# EAGLE board sumo1 (EAGLE 8.3.2)
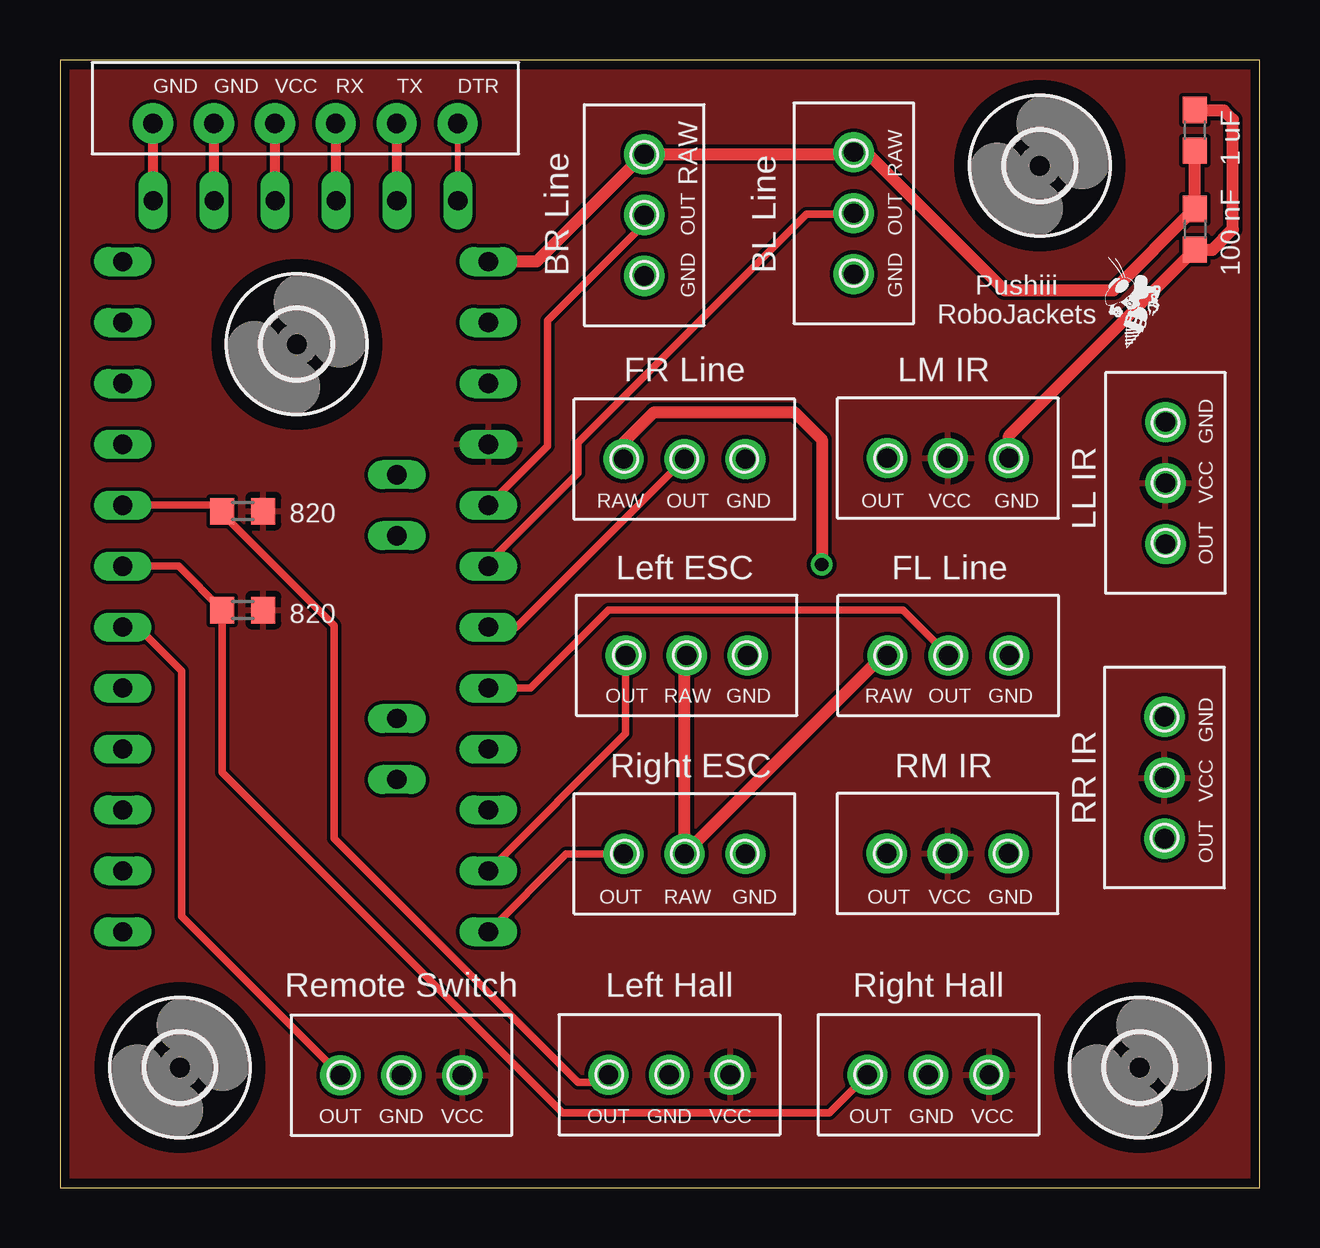
[diagram p0: board, top side]
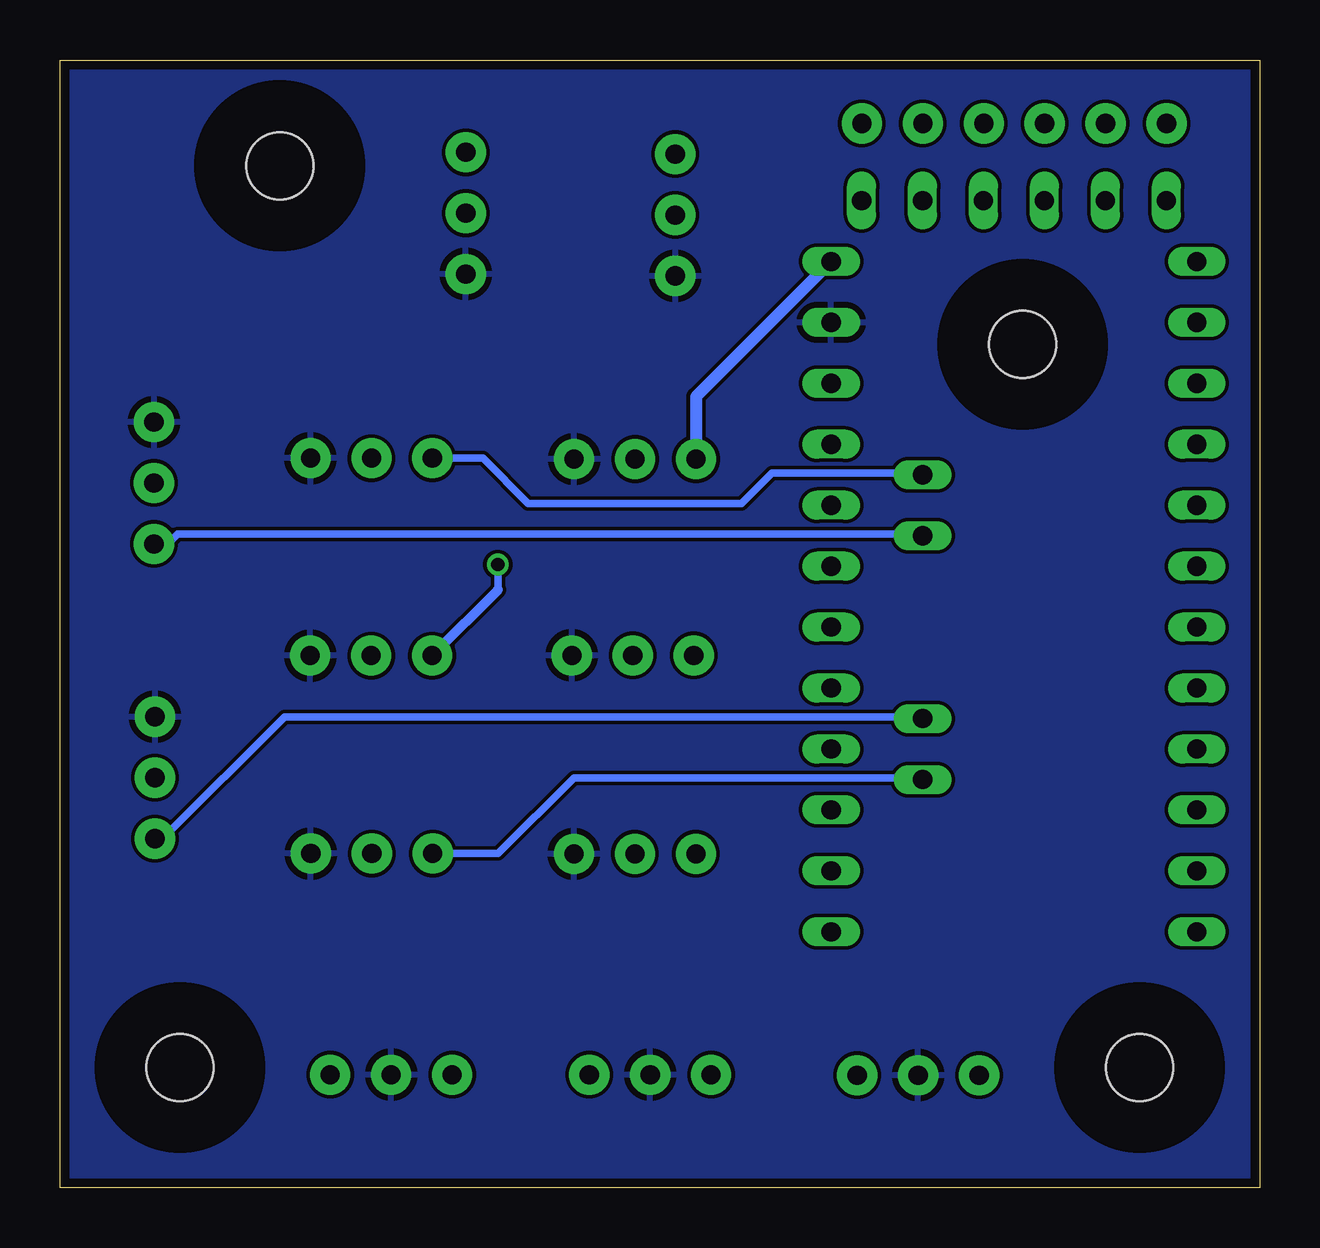
[diagram p1: board, bottom side, seen from below]

Size 50 x 47 mm. Coordinates in mm from the lower left corner, seen from the top.
Outline: 0,0 50,0 50,47 0,47 0,0
Copper layers (1*16): Top 0.0356mm / dielectric 1.5011mm / Bottom 0.0356mm
Design rules "LaenPCBOrder": minimum track width 6mil, minimum drill 13mil, track to track 6mil, track to pad 6mil, pad to pad 6mil, via to via 6mil, smd to smd 6mil, copper to edge 15mil, drill to drill 6mil, minimum pad ring 7mil, minimum via ring 7mil, stop-mask expansion 3mil, vias tented up to drill 0mil, thermal gap 10mil

## Footprints (pad centres in the part's own frame; a part is rotated, then mirrored left to right if it is on the bottom)
PHOENIX_CONTACT_3PIN = drill 0.8 pad 1.676: P$1 -2.54,0; P$2 0,0; P$3 2.54,0
C0603 = smd 1.1 x 1: 1 -0.85,0; 2 0.85,0
R0603 = smd 1 x 1.1: 1 -0.85,0; 2 0.85,0
PRO-MINI-2 = drill 0.8 long: A0 6.35,2.54; A1 6.35,0; A2 6.35,-2.54; A3 6.35,-5.08; A4 2.54,1.27; A5 2.54,3.81; A6 2.54,-8.89; A7 2.54,-6.35; D2 -8.89,2.54; D3 -8.89,0; D4 -8.89,-2.54; D5 -8.89,-5.08; D6 -8.89,-7.62; D7 -8.89,-10.16; D8 -8.89,-12.7; D9 -8.89,-15.24; D10 6.35,-15.24; D11 6.35,-12.7; D12 6.35,-10.16; D13 6.35,-7.62; DTR 5.08,15.24; GND 6.35,10.16; GND1 -8.89,5.08; GND2 -7.62,15.24; GND3 -5.08,15.24; RAW 6.35,12.7; RST 6.35,7.62; RST1 -8.89,7.62; RX1 -8.89,10.16; RX1-1 0,15.24; TX0 -8.89,12.7; TX0-1 2.54,15.24; VCC 6.35,5.08; VCC1 -2.54,15.24
6-PIN = drill 0.8 pad 1.676: DTR -7.62,-1.27; GND3 5.08,-1.27; GND4 2.54,-1.27; RX -2.54,-1.27; TX -5.08,-1.27; VCC 0,-1.27
2,8 = hole 2.8: 0,0

## Placement (x,y rotation side)
BL  PHOENIX_CONTACT_3PIN  [PHOENIX_CONTACT_3PIN]  33.09,40.62 270 top
BR  PHOENIX_CONTACT_3PIN  [PHOENIX_CONTACT_3PIN]  24.35,40.54 270 top
C1  100nF  [C0603]  47.31,39.94 270 top
C2  1uF  [C0603]  47.31,44.07 90 top
FL  PHOENIX_CONTACT_3PIN  [PHOENIX_CONTACT_3PIN]  37.03,22.17 0 top
FR  PHOENIX_CONTACT_3PIN  [PHOENIX_CONTACT_3PIN]  26.03,30.36 0 top
L_ESC  PHOENIX_CONTACT_3PIN  [PHOENIX_CONTACT_3PIN]  26.12,22.18 0 top
L_HALL  PHOENIX_CONTACT_3PIN  [PHOENIX_CONTACT_3PIN]  25.4,4.7 180 top
LL_IR  PHOENIX_CONTACT_3PIN  [PHOENIX_CONTACT_3PIN]  46.08,29.37 90 top
LM_IR  PHOENIX_CONTACT_3PIN  [PHOENIX_CONTACT_3PIN]  37.02,30.4 0 top
R1  820  [R0603]  7.62,28.2 0 top
R2  820  [R0603]  7.62,24.07 0 top
R_ESC  PHOENIX_CONTACT_3PIN  [PHOENIX_CONTACT_3PIN]  26.04,13.91 0 top
R_HALL  PHOENIX_CONTACT_3PIN  [PHOENIX_CONTACT_3PIN]  36.2,4.7 180 top
R_S  PHOENIX_CONTACT_3PIN  [PHOENIX_CONTACT_3PIN]  14.23,4.68 180 top
RM_IR  PHOENIX_CONTACT_3PIN  [PHOENIX_CONTACT_3PIN]  37,13.92 0 top
RR_IR  PHOENIX_CONTACT_3PIN  [PHOENIX_CONTACT_3PIN]  46.04,17.08 90 top
U$1  PRO-MINI-2  [PRO-MINI-2]  11.51,25.9 0 top
U$2  6-PIN  [6-PIN]  8.96,43.09 180 top
U$3  [2,8]  9.87,35.15 0 top
U$4  [2,8]  5,5 0 top
U$5  [2,8]  40.84,42.59 0 top
U$6  [2,8]  45,5 0 top
U$7  [ROBOBUZZ_0.2X]  44.45,34.99 0 top

## Library data of the parts
BL BR FL FR L_ESC L_HALL LL_IR LM_IR R_ESC R_HALL R_S RM_IR RR_IR = Phoenix_Contact_3pin
C1 C2 = rcl
R1 R2 = resistor
U$1 = Arduino-clone
U$2 = 6_PIN
U$3-U$6 = holes
U$7 = RoboJackets-Aesthetics

## Nets
BL: BL.P$2 U$1.A1
BR: BR.P$2 U$1.A0
FL: FL.P$2 U$1.A3
FR: FR.P$2 U$1.A2
GND: BL.P$3 BR.P$3 C1.2 C2.2 FL.P$3 FR.P$3 L_ESC.P$3 L_HALL.P$2 LL_IR.P$3 LM_IR.P$3 R_ESC.P$3 R_HALL.P$2 R_S.P$2 RM_IR.P$3 RR_IR.P$3 U$1.GND
L_HALL: L_HALL.P$3 R1.1 U$1.D2
L_PWM: L_ESC.P$1 U$1.D11
LLO: LL_IR.P$1 U$1.A4
LMO: LM_IR.P$1 U$1.A5
N$1: U$1.GND2 U$2.GND3
N$2: U$1.GND3 U$2.GND4
N$3: U$1.VCC1 U$2.VCC
N$4: U$1.RX1-1 U$2.RX
N$5: U$1.TX0-1 U$2.TX
N$6: U$1.DTR U$2.DTR
R_HALL: R2.1 R_HALL.P$3 U$1.D3
R_PWM: R_ESC.P$1 U$1.D10
RAW: BL.P$1 BR.P$1 C1.1 C2.1 FL.P$1 FR.P$1 L_ESC.P$2 R_ESC.P$2 U$1.RAW
RMO: RM_IR.P$1 U$1.A6
RRO: RR_IR.P$1 U$1.A7
RS_OUT: R_S.P$3 U$1.D4
VCC: L_HALL.P$1 LL_IR.P$2 LM_IR.P$2 R1.2 R2.2 R_HALL.P$1 R_S.P$1 RM_IR.P$2 RR_IR.P$2 U$1.VCC

## Tracks (layer width: path | path; a pad name or v marks a point on that pad's centre or on a via)
BL
  Top 0.305: U$1.A1 17.86,26.05 21.59,29.78 21.59,31.05 31.11,40.58 33.05,40.58 BL.P$2
BR
  Top 0.305: BR.P$2 24.35,40.16 20.32,36.13 20.32,30.91 U$1.A0
FL
  Top 0.305: U$1.A3 19.61,20.82 22.86,24.07 35.13,24.07 FL.P$2
FR
  Top 0.305: U$1.A2 19.02,23.36 FR.P$2
GND
  Top 0.305: 47.33,44.9 C2.2
  Top 0.508: LM_IR.P$3 39.55,31.34 C1.2 48.05,39.09 48.9,39.94 48.9,44.51 48.51,44.9 47.33,44.9
  pour Bottom: 0,0 50,0 50,47 0,47
L_HALL
  Top 0.305: U$1.D2 6.53,28.44 R1.1 6.77,28.09 11.43,23.43 11.43,14.54 21.59,4.38 22.54,4.38 L_HALL.P$3
L_PWM
  Top 0.305: L_ESC.P$1 23.58,18.93 U$1.D11
LLO
  Bottom 0.305: LL_IR.P$1 45.5,26.83 45.09,27.24 14.12,27.24 U$1.A4
LMO
  Bottom 0.305: LM_IR.P$1 32.37,30.4 30.48,28.51 21.59,28.51 20.32,29.78 14.12,29.78 U$1.A5
N$1
  Top 0.254: 3.88,44.34 U$2.GND3
  Top 0.406: U$1.GND2 3.88,44.34
N$2
  Top 0.254: 6.42,44.34 U$2.GND4
  Top 0.406: U$1.GND3 6.42,44.34
N$3
  Top 0.254: 8.96,44.34 U$2.VCC
  Top 0.406: U$1.VCC1 8.96,44.34
N$4
  Top 0.254: 11.51,44.34 U$2.RX
  Top 0.406: U$1.RX1-1 11.51,44.34
N$5
  Top 0.254: 14.04,44.34 U$2.TX
  Top 0.406: U$1.TX0-1 14.04,44.34
N$6
  Top 0.254: U$1.DTR 16.59,44.34 U$2.DTR
R_HALL
  Top 0.305: U$1.D3 4.94,25.9 R2.1 6.77,17.3 20.95,3.11 32.07,3.11 R_HALL.P$3
R_PWM
  Top 0.305: R_ESC.P$1 21.1,13.91 U$1.D10
RAW  (via drill 0.55)
  Top 0.305: 33.01,43.08 BL.P$1 33.62,43.16 | L_ESC.P$2 26.04,22.09 | FL.P$1 34.3,22.17
  Top 0.508: C2.1 C1.1 43.92,37.4 39.37,37.4 33.62,43.16 | U$1.RAW 19.88,38.6 BR.P$1 33.01,43.08 | 26.04,22.09 R_ESC.P$2 34.3,22.17 | FR.P$1 23.49,31.05 24.77,32.32 30.61,32.32 31.75,31.18 v31.75,25.97
  Bottom 0.305: v31.75,25.97 31.75,24.91
  Bottom 0.406: 31.75,24.91 FL.P$1
  Bottom 0.508: FR.P$1 23.49,32.97 U$1.RAW
RMO
  Bottom 0.305: RM_IR.P$1 31.73,13.92 28.57,17.08 14.12,17.08 U$1.A6
RRO
  Bottom 0.305: RR_IR.P$1 45.72,14.54 40.64,19.62 14.12,19.62 U$1.A7
RS_OUT
  Top 0.305: U$1.D4 3.25,23.36 5.08,21.53 5.08,11.29 R_S.P$3
VCC
  pour Top: 0,47 0,0 50,0 50,47

## Text on the board
tPlace: 1 uF | RAW | RAW | BR Line | OUT | BL Line | OUT | 100 nF | GND | GND | Pushiii / RoboJackets | FR Line | LM IR | GND | RAW | OUT | GND | OUT | VCC | GND | LL IR | VCC | 820 | OUT | Left ESC | FL Line | 820 | OUT | RAW | GND | RAW | OUT | GND | GND | Right ESC | RM IR | RR IR | VCC | OUT | OUT | RAW | GND | OUT | VCC | GND | Remote Switch | Left Hall | Right Hall | OUT | GND | VCC | OUT | GND | VCC | OUT | GND | VCC